# Altium PCB PCB1.pcbdoc
Units mil, origin at the board's own origin, x right, y up, seen from the top; angles counter-clockwise.
Board outline 4085 x 4620 mil, 2 copper layers (Top Layer, Bottom Layer); 21 components, 53 nets, 175 pads, 0 vias.
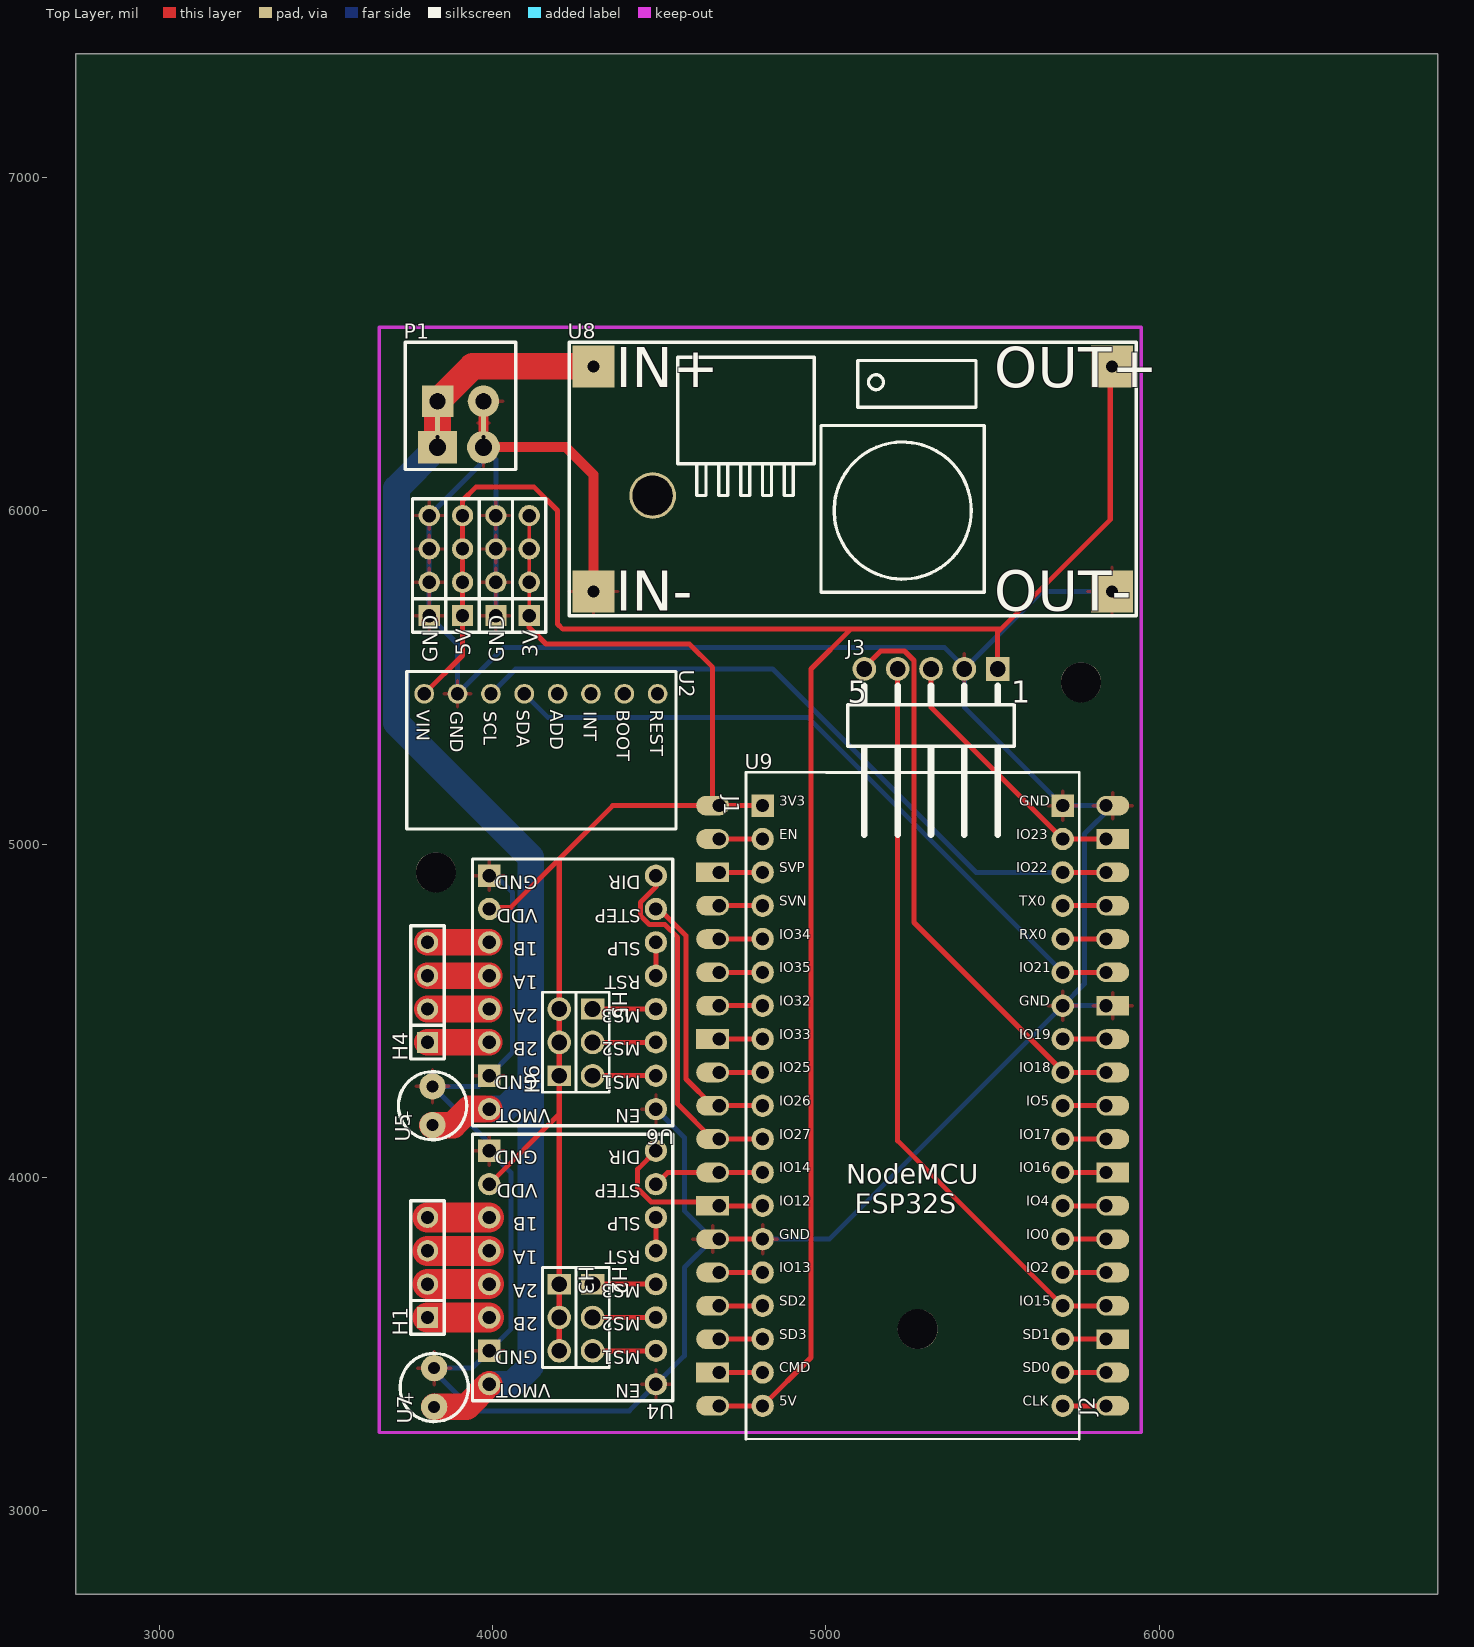
[diagram p0: Top Layer view]
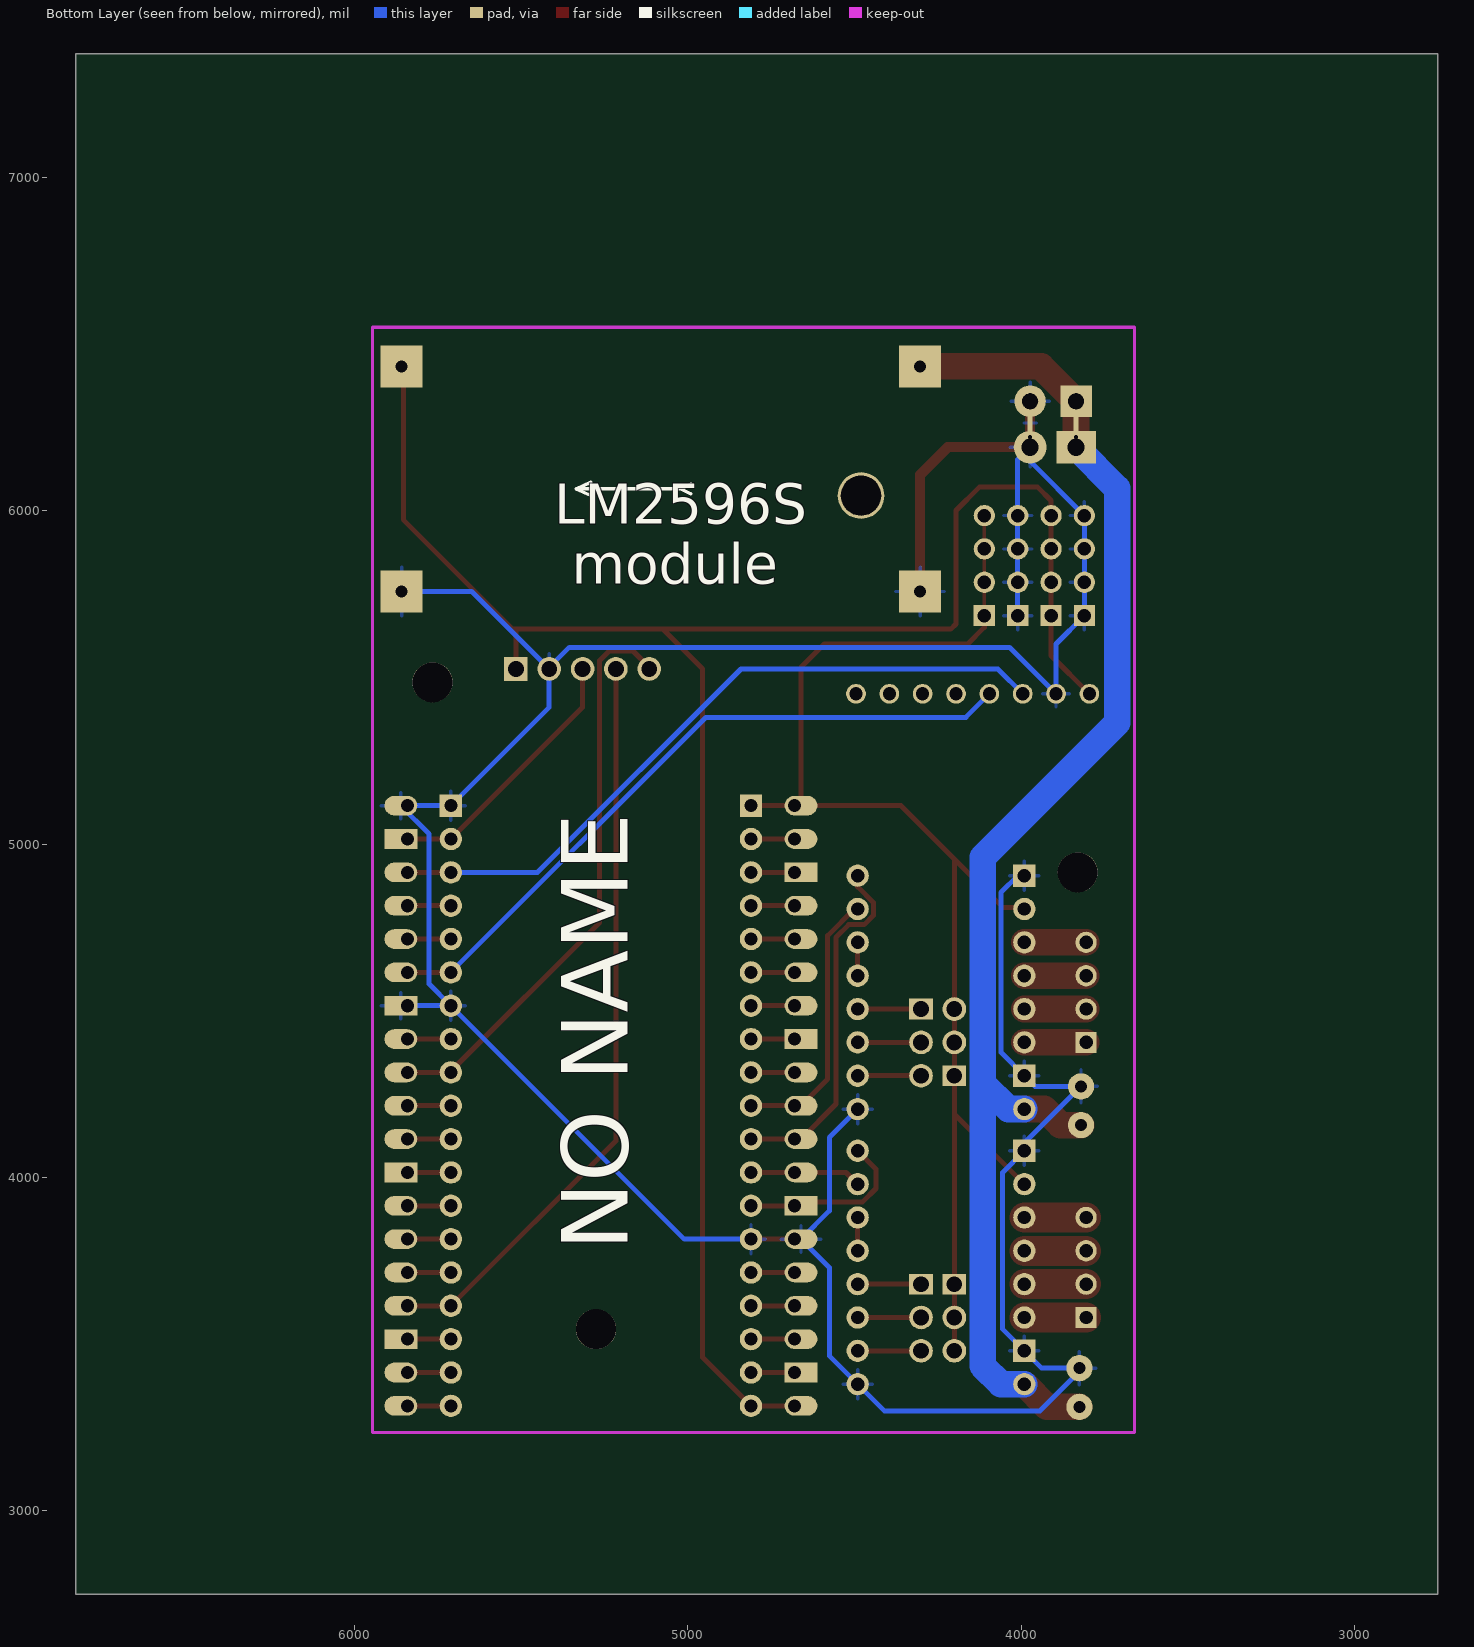
[diagram p1: Bottom Layer view, seen from below]

## Layer stack, top to bottom
Top Layer: signal copper (thickness not stored)
Dielectric: dielectric 12.6, FR-4, Dk 4.8
Bottom Layer: signal copper (thickness not stored)

## Board outline
6835,2750 2750,2750 2750,7370 6835,7370

## Design rules (kind name [scope] priority, off if disabled: settings)
BoardOutlineClearance copperThickness1oz [All] p0: genericclearance=10 ignorepadtopadclearanceinfootprint=FALSE except(0: Arc-SplitContinuation Track-SplitContinuation SMDPad-SplitContinuation THPad-SplitContinuation Via-SplitContinuation Fill-SplitContinuation Poly-SplitContinuation Region-SplitContinuation Text-SplitContinuation; 6: Track-CutoutEdge SMDPad-CutoutEdge THPad-CutoutEdge Via-CutoutEdge Region-CutoutEdge; 11.8: Track-OutlineEdge SMDPad-OutlineEdge THPad-OutlineEdge Via-OutlineEdge Fill-OutlineEdge Region-OutlineEdge Poly-OutlineEdge Text-OutlineEdge Fill-CutoutEdge)
BoardOutlineClearance copperThickness2oz [All] p0: genericclearance=10 ignorepadtopadclearanceinfootprint=FALSE except(0: Arc-SplitContinuation Track-SplitContinuation SMDPad-SplitContinuation THPad-SplitContinuation Via-SplitContinuation Fill-SplitContinuation Poly-SplitContinuation Region-SplitContinuation Text-SplitContinuation; 6: Track-CutoutEdge SMDPad-CutoutEdge THPad-CutoutEdge Via-CutoutEdge Region-CutoutEdge; 11.8: Track-OutlineEdge SMDPad-OutlineEdge THPad-OutlineEdge Via-OutlineEdge Fill-OutlineEdge Region-OutlineEdge Poly-OutlineEdge Text-OutlineEdge Fill-CutoutEdge)
Clearance copperThickness1oz [(InNet('GND') OR InNet('VCC') OR InNet('GPIO9') OR InNet('GPIO13') OR InNet('3.3V') OR InNet('EN') OR InNet('DIR1') OR InNet('STEP1') OR InNet('GPIO25') OR InNet('GPIO33') OR InNet('GPIO32') OR InNet('GPIO35') OR InNet('GPIO34') OR InNet('GPIO39') OR InNet('GPIO36') OR InNet('GPIO10') OR InNet('GPIO11') OR InNet('GPIO1') OR InNet('GPIO3') OR InNet('GPIO6') OR InNet('GPIO7') OR InNet('SDA') OR InNet('GPIO19') OR InNet('CLK') OR InNet('GPIO5') OR InNet('GPIO17') OR InNet('GPIO16') OR InNet('GPIO4') OR InNet('GPIO0') OR InNet('GPIO2') OR InNet('CS') OR InNet('GPIO8') OR InNet('SCL') OR InNet('DIN') OR InNet('DIR2') OR InNet('STEP2') OR InNet('$1N9070') OR InNet('$1N9076') OR InNet('$1N9083') OR InNet('$1N9090') OR InNet('$1N9269') OR InNet('$1N9264') OR InNet('$1N9258') OR InNet('$1N10105') OR InNet('$1N10101') OR InNet('$1N10118') OR InNet('$1N10108') OR InNet('$1N10140') OR InNet('$1N10143') OR InNet('$1N10137') OR InNet('12V') OR InNet('$1N9154') OR InNet('$1N10129'))] p1: gap=7 ignorepadtopadclearanceinfootprint=FALSE except(4: Track-Track; 6: Track-SMDPad SMDPad-SMDPad Track-THPad SMDPad-THPad THPad-THPad Track-Via SMDPad-Via THPad-Via Via-Via SMDPad-Fill THPad-Fill Via-Fill Fill-Fill Track-Region SMDPad-Region THPad-Region Via-Region Region-Region Track-Poly SMDPad-Poly THPad-Poly Via-Poly Fill-Poly Region-Poly Poly-Poly Track-Text SMDPad-Text THPad-Text Via-Text Fill-Text Region-Text Poly-Text Text-Text; 6.9: Track-Hole SMDPad-Hole THPad-Hole Via-Hole Fill-Hole Region-Hole Poly-Hole Text-Hole Sheet-Hole; 11.8: Track-Fill Fill-Region Track-Sheet SMDPad-Sheet THPad-Sheet Via-Sheet Fill-Sheet Region-Sheet Poly-Sheet Text-Sheet)
Clearance copperThickness2oz [All] p1: gap=7 ignorepadtopadclearanceinfootprint=FALSE except(6: Track-SMDPad SMDPad-SMDPad Track-THPad SMDPad-THPad THPad-THPad Track-Via SMDPad-Via THPad-Via Via-Via SMDPad-Fill THPad-Fill Via-Fill Fill-Fill Track-Region SMDPad-Region THPad-Region Via-Region Region-Region Track-Poly SMDPad-Poly THPad-Poly Via-Poly Fill-Poly Region-Poly Poly-Poly Track-Text SMDPad-Text THPad-Text Via-Text Fill-Text Region-Text Poly-Text Text-Text; 6.9: Track-Hole SMDPad-Hole THPad-Hole Via-Hole Fill-Hole Region-Hole Poly-Hole Text-Hole Sheet-Hole; 8: Track-Track; 11.8: Track-Fill Fill-Region Track-Sheet SMDPad-Sheet THPad-Sheet Via-Sheet Fill-Sheet Region-Sheet Poly-Sheet Text-Sheet)
DiffPairsRouting differentialPair [All] p1: maxuncoupledlength=10 minlimit=6 maxlimit=6 mostfreqgap=6 toplayer_minwidth=5 toplayer_prefwidth=10 toplayer_maxwidth=100 bottomlayer_minwidth=5 bottomlayer_prefwidth=10 bottomlayer_maxwidth=100
PasteMaskExpansion pasteMaskExpansion [All] p1: expansion=0
PlaneConnect innerPlane [All] p1: planeconnectstyle=Relief reliefexpansion=20 reliefentries=4 reliefconductorwidth=10 reliefairgap=10
PolygonConnect copperRegion [All] p1: connectstyle=Relief reliefentries=4 reliefconductorwidth=10 polygonreliefangle="90 Angle" airgapwidth=10
RoutingVias viaSize [All] p1: viastyle="Through Hole" holewidth=12.0078 minholewidth=11.811 maxholewidth=248.0314 width=24.0158 minwidth=19.685 maxwidth=393.7008
SolderMaskExpansion solderMaskExpansion [All] p1: useseparateexpansions=TRUE expansion=2 expansionbottom=2
Width copperThickness1oz [All] p1: maxlimit=100 minlimit=5 preferedwidth=10
Width copperThickness2oz [All] p1: maxlimit=100 minlimit=8 preferedwidth=10

## Components (designator, comment, footprint, x,y, rotation, side; value= is the part's Value field where it differs from the comment)
3V "HX PH254-01-04-Z-L11.5 straight pin header" HDR-TH_4P-HX-PH254-01-04-Z-L11.5 4110,5835 r90 top
5V "HX PH254-01-04-Z-L11.5 straight pin header" HDR-TH_4P-HX-PH254-01-04-Z-L11.5 3910,5835 r90 top
GND "HX PH254-01-04-Z-L11.5 straight pin header" HDR-TH_4P-HX-PH254-01-04-Z-L11.5 4010,5835 r90 top
GND "HX PH254-01-04-Z-L11.5 straight pin header" HDR-TH_4P-HX-PH254-01-04-Z-L11.5 3810,5835 r90 top
H1 "HX PH254-01-04-Z-L11.5 straight pin header" HDR-TH_4P-HX-PH254-01-04-Z-L11.5 3805,3730 r90 top
H2 "HX PH254-01-03-Z-L11.5 pcb pin header" HDR-TH_3P-P2.54-V-M-1 4300,3580 r270 top
H3 "HX PH254-01-03-Z-L11.5 pcb pin header" HDR-TH_3P-P2.54-V-M-1 4200,3580 r270 top
H4 "HX PH254-01-04-Z-L11.5 straight pin header" HDR-TH_4P-HX-PH254-01-04-Z-L11.5 3805,4555 r90 top
H5 "HX PH254-01-03-Z-L11.5 pcb pin header" HDR-TH_3P-P2.54-V-M-1 4300,4405 r270 top
H6 "HX PH254-01-03-Z-L11.5 pcb pin header" HDR-TH_3P-P2.54-V-M-1 4200,4405 r90 top
J1 "2.54mm 1x22 Pin Header DIP" IDC-1X20 4660,5115 r270 top
J2 "2.54mm 1x22 Pin Header DIP" IDC-1X20 5860,3315 r90 top
J3 "KK254_PCB-header_right-angle_5Pin" KK254_PCB-HEADER_RIGHT-ANGLE_5PIN 5515,5525 r0 top
P1 "2 pin pluggable terminal block socket" TERMINAL_PLUGGABLE_MALE_1X2_3.5MM 3835,6190 r0 top
U2 "GY-BNO055" BNO055 3742.91,5517.44 r270 top
U4 "A4988 Stepper Motor Driver Module2" POLOLU_BREAKOUT-16_15.2X20.3MM_HARIS 4240,3730 r180 top
U5 "B35281411" ELECTROLYTIC_CAPACITOR_5X11 3820,4215 r90 top
U6 "A4988 Stepper Motor Driver Module2" POLOLU_BREAKOUT-16_15.2X20.3MM_HARIS 4240,4555 r180 top
U7 "B35281411" ELECTROLYTIC_CAPACITOR_5X11 3825,3370 r90 top
U8 "LM2596 DC-DC adjustable step-down" "LM2596 DC-DC adjustable step-down" 4230,5685 r0 top
U9 "ESP32-DEVKITV1-38PIN" "ESP32 NODEMCU 38 PINS FOOTPRINT" 4810,5115 r0 top

## Footprints (in the part's own frame and the unit in brackets; to place one, negate y for a bottom-side part, rotate by r counter-clockwise, add the part's x,y. Pads: shape width x height; smd on the part's side, far side on the other; paste and mask are expansions set on the pad)
BNO055 [mm]
  round 1.5 hole 1: 1(1.7,1.324) 2(1.7,3.864) 3(1.7,6.404) 4(1.7,8.944) 5(1.7,11.484) 6(1.7,14.024) 7(1.7,16.564) 8(1.7,19.104)
  silkscreen extent 0,0 12,20.5
ELECTROLYTIC_CAPACITOR_5X11 [mm]
  round 2 hole 0.914: 1(-1.475,0) 2(1.475,0)
  silkscreen extent -2.6,-2.6 2.6,2.6
"ESP32 NODEMCU 38 PINS FOOTPRINT" [mm]
  rect 1.7x1.7 hole 1: 1(0,0) 38(22.86,0)
  round 1.7 hole 1: 2(0,-2.54) 3(0,-5.08) 4(0,-7.62) 5(0,-10.16) 6(0,-12.7) 7(0,-15.24) 8(0,-17.78) 9(0,-20.32) 10(0,-22.86) 11(0,-25.4) 12(0,-27.94) 13(0,-30.48) 14(0,-33.02) 15(0,-35.56) 16(0,-38.1) 17(0,-40.64) 18(0,-43.18) 19(0,-45.72) 20(22.86,-45.72) 21(22.86,-43.18) 22(22.86,-40.64) 23(22.86,-38.1) 24(22.86,-35.56) 25(22.86,-33.02) 26(22.86,-30.48) 27(22.86,-27.94) 28(22.86,-25.4) 29(22.86,-22.86) 30(22.86,-20.32) 31(22.86,-17.78) 32(22.86,-15.24) 33(22.86,-12.7) 34(22.86,-10.16) 35(22.86,-7.62) 36(22.86,-5.08) 37(22.86,-2.54)
  silkscreen extent -1.27,-48.26 24.13,2.54
HDR-TH_3P-P2.54-V-M-1 [mm]
  rect 1.575x1.8 hole 1.2: 1(-2.54,0)
  round 1.8 hole 1.2: 2(0,0) 3(2.54,0)
  silkscreen extent -3.81,-1.27 3.81,1.27
HDR-TH_4P-HX-PH254-01-04-Z-L11.5 [mm]
  rect 1.62x1.62 hole 1.02: 1(-3.81,0)
  round 1.62 hole 1.02: 2(-1.27,0) 3(1.27,0) 4(3.81,0)
  silkscreen extent -5.08,-1.27 5.08,1.27
IDC-1X20 [mm]
  oval 1.5x2.5 hole 1 copper offset 0,-0.5: 1(0,0.5) 2(2.54,0.5) 4(7.62,0.5) 5(10.16,0.5) 6(12.7,0.5) 7(15.24,0.5) 9(20.32,0.5) 10(22.86,0.5) 11(25.4,0.5) 12(27.94,0.5) 14(33.02,0.5) 15(35.56,0.5) 16(38.1,0.5) 17(40.64,0.5) 19(45.72,0.5)
  rect 1.5x2.5 hole 1 copper offset 0,-0.5: 3(5.08,0.5) 8(17.78,0.5) 13(30.48,0.5) 18(43.18,0.5)
KK254_PCB-HEADER_RIGHT-ANGLE_5PIN [mm]
  rect 1.8x1.8 hole 1.2: 1(0,0)
  round 1.8 hole 1.2: 2(-2.54,0) 3(-5.08,0) 4(-7.62,0) 5(-10.16,0)
  silkscreen extent -11.43,-12.61 1.27,-1.27
"LM2596 DC-DC adjustable step-down" [mm]
  rect 3.2x3.2 hole 0.914: 1(1.842,18.987) 2(1.841,1.842) 3(41.339,1.842) 4(41.339,18.987)
  silkscreen extent 0,0 43.18,20.83
POLOLU_BREAKOUT-16_15.2X20.3MM_HARIS [mm]
  round 1.7 hole 1.021: 1(-6.35,8.89)
  round 1.7 hole 1.02: 2(-6.35,6.35) 3(-6.35,3.81) 4(-6.35,1.27) 5(-6.35,-1.27) 6(-6.35,-3.81) 7(-6.35,-6.35) 8(-6.35,-8.89) 10(6.35,-6.35) 11(6.35,-3.81) 12(6.35,-1.27) 13(6.35,1.27) 14(6.35,3.81) 16(6.35,8.89)
  rect 1.7x1.7 hole 1.02: 9(6.35,-8.89) 15(6.35,6.35)
  silkscreen extent -7.62,-10.16 7.62,10.16
TERMINAL_PLUGGABLE_MALE_1X2_3.5MM [mm]
  rect 2.4x2.4 hole 1.2 slot 1.205 at 0 deg copper offset 0,0: 1(0,3.5)
  rect 3x2.5 hole 1.3: 1(0,0)
  rect 0.4x2.4 hole 0.32 copper offset 0,1.08: 1(0.001,0.769) 2(3.501,0.769)
  round 2.4 hole 1.2 slot 1.205 at 0 deg copper offset 0,0: 2(3.5,3.5)
  round 2.5 hole 1.3: 2(3.5,0)
  silkscreen extent -2.45,-1.7 5.95,8

## Free pads (board coordinates)
  round 120 hole 120 unplated: 1(3830,4915) 1(5275,3545) 1(5765,5485)
  round 140 hole 120 unplated: 1(4480,6045)

## Nets (pads, with @x,y where several pads share a name; then routed paths per layer and width w, separated by ;. In a path a pad name is that pad's centre, name@x,y a point inside that pad or via, vN(x,y) a via of type N, cw(c..) or ccw(c..) an arc to the next point about the centre after c; other vN are vias at no path point)
3.3V: 3V.1 3V.2 3V.3 3V.4 H3.1 H3.2 H3.3 H6.1 H6.2 H6.3 J1.1 U4.10 U6.10 U9.1 | length 4070.1
  Top Layer w10: 3V.1 3V.2 3V.3 3V.4
  Top Layer w15: U4.10 4200,4190 ; U6.10 3995,4810 4055,4810 4200,4955 ; 3V.1 4110,5650 4160,5600 4590,5600 4660,5530 J1.1@4660,5115 ; H3.3 H3.2 H3.1 4200,4190 ; U9.1 J1.1@4660,5115 ; 4200,4190 H6.1 H6.2 H6.3 4200,4955 ; 4200,4955 4360,5115 J1.1@4660,5115
12V: P1.1 U4.16 U5.1 U6.16 U7.1 U8.1 | length 4309.7
  Top Layer w80: U5.1 3881.93,4156.93 3930,4205 U6.16 ; U7.1 3921.93,3311.93 U4.16 ; P1.1@3835,6190 3835,6262.83 3835,6327.79 3939.73,6432.52 U8.1
  Bottom Layer w80: P1.1@3835,6190 3711.81,6066.81 3711.81,5363.19 4115,4960 4115,4282.46 ; U4.16 4060,3380 4115,3435 4115,4282.46 ; U6.16 4037.54,4205 4115,4282.46
$1N9070: H1.4 U4.11 | length 185
  Top Layer w90: H1.4 U4.11
$1N9076: H1.3 U4.12 | length 185
  Top Layer w90: H1.3 U4.12
$1N9083: H1.2 U4.13 | length 185
  Top Layer w90: H1.2 U4.13
$1N9090: H1.1 U4.14 | length 185
  Top Layer w90: H1.1 U4.14
$1N9154: U4.5 U4.6 | length 100
  Top Layer w15: U4.5 U4.6
$1N9258: H2.1 U4.4 | length 190
  Top Layer w15: H2.1 U4.4
$1N9264: H2.2 U4.3 | length 190
  Top Layer w15: H2.2 U4.3
$1N9269: H2.3 U4.2 | length 190
  Top Layer w15: H2.3 U4.2
$1N10101: H4.3 U6.12 | length 185
  Top Layer w80: H4.3 U6.12
$1N10105: H4.4 U6.11 | length 185
  Top Layer w80: H4.4 U6.11
$1N10108: H4.1 U6.14 | length 185
  Top Layer w80: H4.1 U6.14
$1N10118: H4.2 U6.13 | length 185
  Top Layer w80: H4.2 U6.13
$1N10129: U6.5 U6.6 | length 100
  Top Layer w15: U6.5 U6.6
$1N10137: H5.1 U6.4 | length 190
  Top Layer w15: H5.1 U6.4
$1N10140: H5.3 U6.2 | length 190
  Top Layer w15: H5.3 U6.2
$1N10143: H5.2 U6.3 | length 190
  Top Layer w15: H5.2 U6.3
CLK: J2.11 J3.5 U9.30 | length 1751.1
  Top Layer w15: J3.5@5115,5530 5163.92,5578.92 5235.26,5578.92 5263.92,5550.26 5263.92,4764.69 5705,4323.6 5705,4320 U9.30 J2.11@5860,4315
CS: J2.4 J3.4 U9.23 | length 2265
  Top Layer w15: J3.4 5215,4110 U9.23 J2.4@5860,3615
DIN: J2.18 J3.3 U9.37 | length 828.6
  Top Layer w15: J3.3@5315,5530 5315,5410 U9.37 J2.18@5860,5015
DIR1: J1.13 U4.8 U9.13 | length 532.4
  Top Layer w15: U4.8 4435,4025 4435,3966.95 4475,3926.95 4648.05,3926.95 4660,3915 U9.13
DIR2: J1.11 U6.8 U9.11 | length 1076.5
  Top Layer w15: U6.8 4490,4871.4 4443.05,4824.45 4443.05,4785.55 4470.55,4758.05 4516.95,4758.05 4555,4720 4555,4220 4660,4115 U9.11
EN: J1.2 U9.2 | length 150
  Top Layer w15: J1.2@4660,5015 U9.2
GND: GND.1 GND.2 GND.3 GND.4 J1.14 J2.13 J2.19 J3.2 P1.2 U2.2 U4.1 U4.9 U4.15 U5.2 U6.1 U6.9 U6.15 U7.2 U8.2 U8.3 U9.14 U9.32 U9.38 | length 10873.1
  Top Layer w15: J1.14@4660,3815 U9.14
  Top Layer w30: P1.2@3972.8,6327.79 3972.8,6262.83 3972.8,6190 4220,6190 4302.5,6107.5 U8.2
  Bottom Layer w15: U6.9 4010,4905 4060,4855 4060,4375 U6.15 3958.07,4273.07 U5.2 3990,4103.07 U4.9 4055,4015 4055,3545 U4.15 3938.07,3428.07 U7.2 3825,3418.07 3943.07,3300 4410,3300 U4.1 4575,3465 4575,3730 4660,3815 4575,3900 4575,4120 U6.1 ; GND.1@4010,5685 4010,5785 4010,5885 4010,5985 4010,6152.8 3972.8,6190 3972.8,6147.8 3810,5985 3810,5885 3810,5785 3810,5685 3895.04,5599.96 U2.2 4034.53,5590 5355,5590 J3.2@5415,5530 ; U9.14 5010,3815 U9.32 ; J2.19@5857.52,5117.48 J2.19@5860,5115 ; U8.3 5647.52,5757.52 J3.2 5415,5409.99 U9.38 J2.19@5860,5115 ; J2.13@5860,4515 U9.32 ; U9.32 5775,4580 5775,5030 J2.19@5860,5115
GPIO0: J2.6 U9.25 | length 150
  Top Layer w15: U9.25 J2.6@5860,3815
GPIO1: J2.16 U9.35 | length 150
  Top Layer w15: U9.35 J2.16@5860,4815
GPIO2: J2.5 U9.24 | length 150
  Top Layer w15: U9.24 J2.5@5860,3715
GPIO3: J2.15 U9.34 | length 150
  Top Layer w15: U9.34 J2.15@5860,4715
GPIO4: J2.7 U9.26 | length 150
  Top Layer w15: U9.26 J2.7@5860,3915
GPIO5: J2.10 U9.29 | length 150
  Top Layer w15: U9.29 J2.10@5860,4215
GPIO6: J2.1 U9.20 | length 150
  Top Layer w15: U9.20 J2.1@5860,3315
GPIO7: J2.2 U9.21 | length 150
  Top Layer w15: U9.21 J2.2@5860,3415
GPIO8: J2.3 U9.22 | length 150
  Top Layer w15: U9.22 J2.3@5860,3515
GPIO9: J1.16 U9.16 | length 150
  Top Layer w15: J1.16@4660,3615 U9.16
GPIO10: J1.17 U9.17 | length 150
  Top Layer w15: J1.17@4660,3515 U9.17
GPIO11: J1.18 U9.18 | length 150
  Top Layer w15: J1.18@4660,3415 U9.18
GPIO13: J1.15 U9.15 | length 150
  Top Layer w15: J1.15@4660,3715 U9.15
GPIO16: J2.8 U9.27 | length 150
  Top Layer w15: U9.27 J2.8@5860,4015
GPIO17: J2.9 U9.28 | length 150
  Top Layer w15: U9.28 J2.9@5860,4115
GPIO19: J2.12 U9.31 | length 150
  Top Layer w15: U9.31 J2.12@5860,4415
GPIO25: J1.9 U9.9 | length 150
  Top Layer w15: J1.9@4660,4315 U9.9
GPIO32: J1.7 U9.7 | length 150
  Top Layer w15: J1.7@4660,4515 U9.7
GPIO33: J1.8 U9.8 | length 150
  Top Layer w15: J1.8@4660,4415 U9.8
GPIO34: J1.5 U9.5 | length 150
  Top Layer w15: J1.5@4660,4715 U9.5
GPIO35: J1.6 U9.6 | length 150
  Top Layer w15: J1.6@4660,4615 U9.6
GPIO36: J1.3 U9.3 | length 150
  Top Layer w15: J1.3@4660,4915 U9.3
GPIO39: J1.4 U9.4 | length 150
  Top Layer w15: J1.4@4660,4815 U9.4
SCL: J2.17 U2.3 U9.36 | length 2148.5
  Top Layer w15: U9.36 J2.17@5860,4915
  Bottom Layer w15: U2.3 4069.53,5525 4840,5525 5450,4915 U9.36
SDA: J2.14 U2.4 U9.33 | length 2111
  Top Layer w15: U9.33 J2.14@5860,4615
  Bottom Layer w15: U2.4 4165.55,5380 4945,5380 U9.33
STEP1: J1.12 U4.7 U9.12 | length 334.5
  Top Layer w15: U4.7 4525,4015 4660,4015 U9.12
STEP2: J1.10 U6.7 U9.10 | length 816.3
  Top Layer w15: U6.7 4500,4805 4580,4725 4580,4295 4660,4215 U9.10
VCC: 5V.1 5V.2 5V.3 5V.4 J1.19 J3.1 U2.1 U8.4 U9.19 | length 6266.2
  Top Layer w15: U2.1 3910,5565.47 5V.1 5V.2 5V.3 5V.4 3910,6030 3950,6070 4125,6070 4195,6000 4195,5660 4210.91,5644.09 5074.09,5644.09 ; J1.19@4660,3315 U9.19 4955,3460 4955,5525 5074.09,5644.09 ; J3.1@5515,5530 5515,5635 5524.09,5644.09 ; U8.4 5852.52,6427.52 5852.52,5972.52 5524.09,5644.09 ; 5074.09,5644.09 5524.09,5644.09
pads on no net: U2.5 U2.6 U2.7 U2.8

## Polygon pours and split planes (outlines as drawn)
GND on Bottom Layer (solid, remove dead copper, pour order 2): 3000,7120 6585,7120 6585,3060 3000,3060
GND on Top Layer (solid, remove dead copper, pour order 0): 3305,7055 6365,7055 6365,3000 3305,3000

## Keep-outs
Board Outline Layer:
  lines w10: 3660,3235 5945,3235 5945,6550 3660,6550 3660,3235

## Silkscreen, mask and mechanical layers (free items; w line width, h text height)
Bottom Silkscreen Layer:
  text "NO NAME" at 5180,3780 h200 r270

## Text inside footprints (layer, text, board x,y; h text height)
J3: Top Silkscreen Layer "1" at 5555,5423.25 h65.34; Top Silkscreen Layer "5" at 5065,5423.25 h65.34
U2: Top Silkscreen Layer "VIN" at 3772.91,5402.44 h39.37 r270; Top Silkscreen Layer "GND" at 3872.91,5397.44 h39.37 r270; Top Silkscreen Layer "SCL" at 3972.91,5397.44 h39.37 r270; Top Silkscreen Layer "SDA" at 4072.91,5402.44 h39.37 r270; Top Silkscreen Layer "ADD" at 4172.91,5402.44 h39.37 r270; Top Silkscreen Layer "INT" at 4272.91,5397.44 h39.37 r270; Top Silkscreen Layer "BOOT" at 4372.91,5402.44 h39.37 r270; Top Silkscreen Layer "REST" at 4472.91,5402.44 h39.37 r270
U4: Top Silkscreen Layer "MS1" at 4445,3480 h40 r180; Top Silkscreen Layer "MS2" at 4445,3580 h40 r180; Top Silkscreen Layer "MS3" at 4445,3680 h40 r180; Top Silkscreen Layer "STEP" at 4445,3980 h40 r180; Top Silkscreen Layer "DIR" at 4445,4080 h40 r180; Top Silkscreen Layer "GND" at 4135,4080 h40 r180; Top Silkscreen Layer "VDD" at 4135,3980 h40 r180; Top Silkscreen Layer "1B" at 4135,3880 h40 r180; Top Silkscreen Layer "1A" at 4135,3780 h40 r180; Top Silkscreen Layer "2A" at 4135,3680 h40 r180; Top Silkscreen Layer "2B" at 4135,3580 h40 r180; Top Silkscreen Layer "GND" at 4135,3480 h40 r180; Top Silkscreen Layer "VMOT" at 4175,3380 h40 r180; Top Silkscreen Layer "EN" at 4445,3380 h40 r180; Top Silkscreen Layer "RST" at 4445,3780 h40 r180; Top Silkscreen Layer "SLP" at 4445,3880 h40 r180
U5: Top Silkscreen Layer "+" at 3759.27,4165.8 h32 r90
U6: Top Silkscreen Layer "MS1" at 4445,4305 h40 r180; Top Silkscreen Layer "MS2" at 4445,4405 h40 r180; Top Silkscreen Layer "MS3" at 4445,4505 h40 r180; Top Silkscreen Layer "STEP" at 4445,4805 h40 r180; Top Silkscreen Layer "DIR" at 4445,4905 h40 r180; Top Silkscreen Layer "GND" at 4135,4905 h40 r180; Top Silkscreen Layer "VDD" at 4135,4805 h40 r180; Top Silkscreen Layer "1B" at 4135,4705 h40 r180; Top Silkscreen Layer "1A" at 4135,4605 h40 r180; Top Silkscreen Layer "2A" at 4135,4505 h40 r180; Top Silkscreen Layer "2B" at 4135,4405 h40 r180; Top Silkscreen Layer "GND" at 4135,4305 h40 r180; Top Silkscreen Layer "VMOT" at 4175,4205 h40 r180; Top Silkscreen Layer "EN" at 4445,4205 h40 r180; Top Silkscreen Layer "RST" at 4445,4605 h40 r180; Top Silkscreen Layer "SLP" at 4445,4705 h40 r180
U7: Top Silkscreen Layer "+" at 3764.27,3320.8 h32 r90
U8: Top Silkscreen Layer "IN+" at 4370,6370 h120; Top Silkscreen Layer "IN-" at 4370,5700 h120; Top Silkscreen Layer "OUT+" at 5505,6370 h120; Top Silkscreen Layer "OUT-" at 5505,5700 h120; Bottom Silkscreen Layer "LM2596S /  module" at 5400,5780 h120
U9: Top Silkscreen Layer "SD2" at 4860,3615 h30; Top Silkscreen Layer "IO13" at 4860,3715 h30; Top Silkscreen Layer "GND" at 4860,3815 h30; Top Silkscreen Layer "IO12" at 4860,3915 h30; Top Silkscreen Layer "IO14" at 4860,4015 h30; Top Silkscreen Layer "IO27" at 4860,4115 h30; Top Silkscreen Layer "IO26" at 4860,4215 h30; Top Silkscreen Layer "IO25" at 4860,4315 h30; Top Silkscreen Layer "IO33" at 4860,4415 h30; Top Silkscreen Layer "IO32" at 4860,4515 h30; Top Silkscreen Layer "IO35" at 4860,4615 h30; Top Silkscreen Layer "IO34" at 4860,4715 h30; Top Silkscreen Layer "SVN" at 4860,4815 h30; Top Silkscreen Layer "SVP" at 4860,4915 h30; Top Silkscreen Layer "RX0" at 5580,4715 h30; Top Silkscreen Layer "IO15" at 5580,3615 h30; Top Silkscreen Layer "IO2" at 5600,3715 h30; Top Silkscreen Layer "IO0" at 5600,3815 h30; Top Silkscreen Layer "IO4" at 5600,3915 h30; Top Silkscreen Layer "IO16" at 5580,4015 h30; Top Silkscreen Layer "IO17" at 5580,4115 h30; Top Silkscreen Layer "IO5" at 5600,4215 h30; Top Silkscreen Layer "IO18" at 5580,4315 h30; Top Silkscreen Layer "IO19" at 5580,4415 h30; Top Silkscreen Layer "GND" at 5580,4515 h30; Top Silkscreen Layer "IO21" at 5580,4615 h30; Top Silkscreen Layer "TX0" at 5580,4815 h30; Top Silkscreen Layer "IO22" at 5570,4915 h30; Top Silkscreen Layer "IO23" at 5570,5015 h30; Top Silkscreen Layer "EN" at 4860,5015 h30; Top Silkscreen Layer "SD1" at 5590,3515 h30; Top Silkscreen Layer "SD0" at 5590,3415 h30; Top Silkscreen Layer "GND" at 5580,5115 h30; Top Silkscreen Layer "3V3" at 4860,5115 h30; Top Silkscreen Layer "SD3" at 4860,3515 h30; Top Silkscreen Layer "CMD" at 4860,3415 h30; Top Silkscreen Layer "NodeMCU /  ESP32S" at 5060,3892.8 h59.05; Top Silkscreen Layer "CLK" at 5590,3315 h30; Top Silkscreen Layer "5V" at 4860,3315 h30